# EAGLE board inga_charger_panelized (EAGLE 7.2.0)
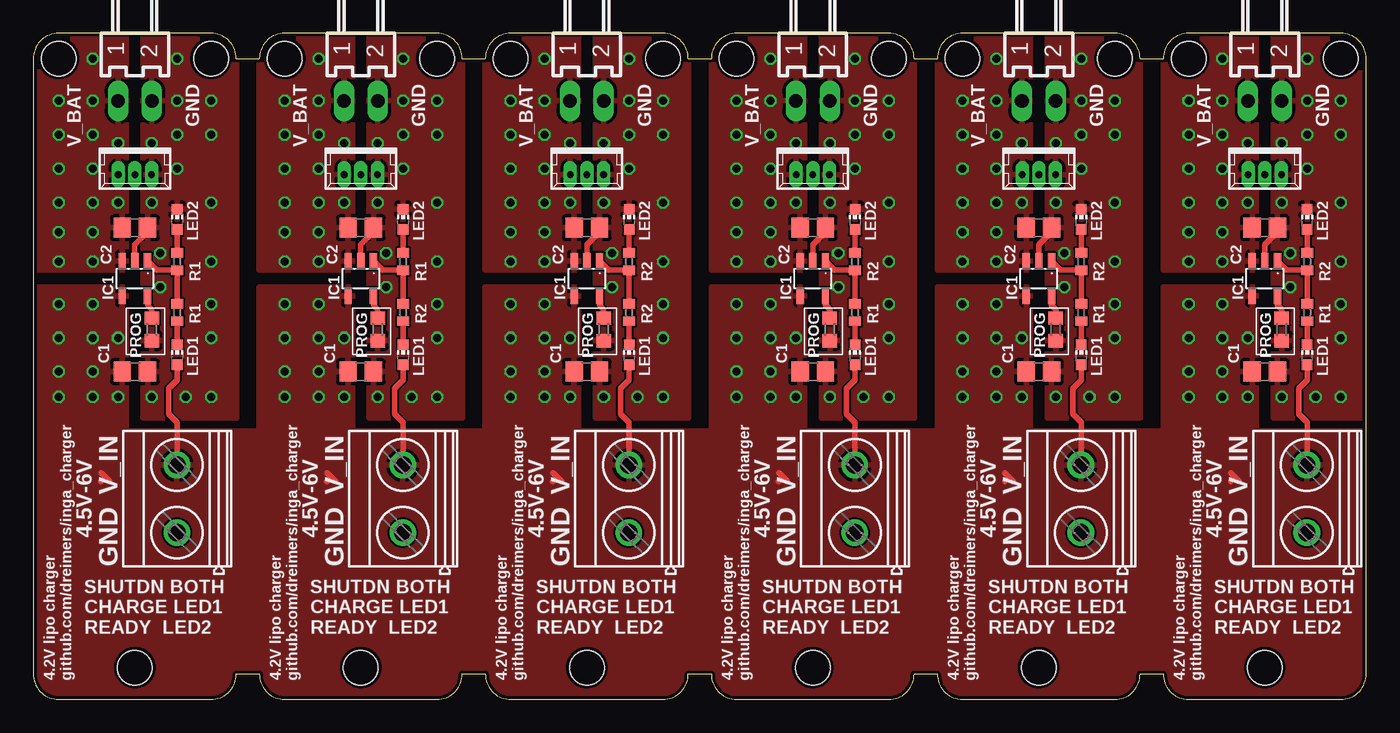
[diagram p0: board, top side]
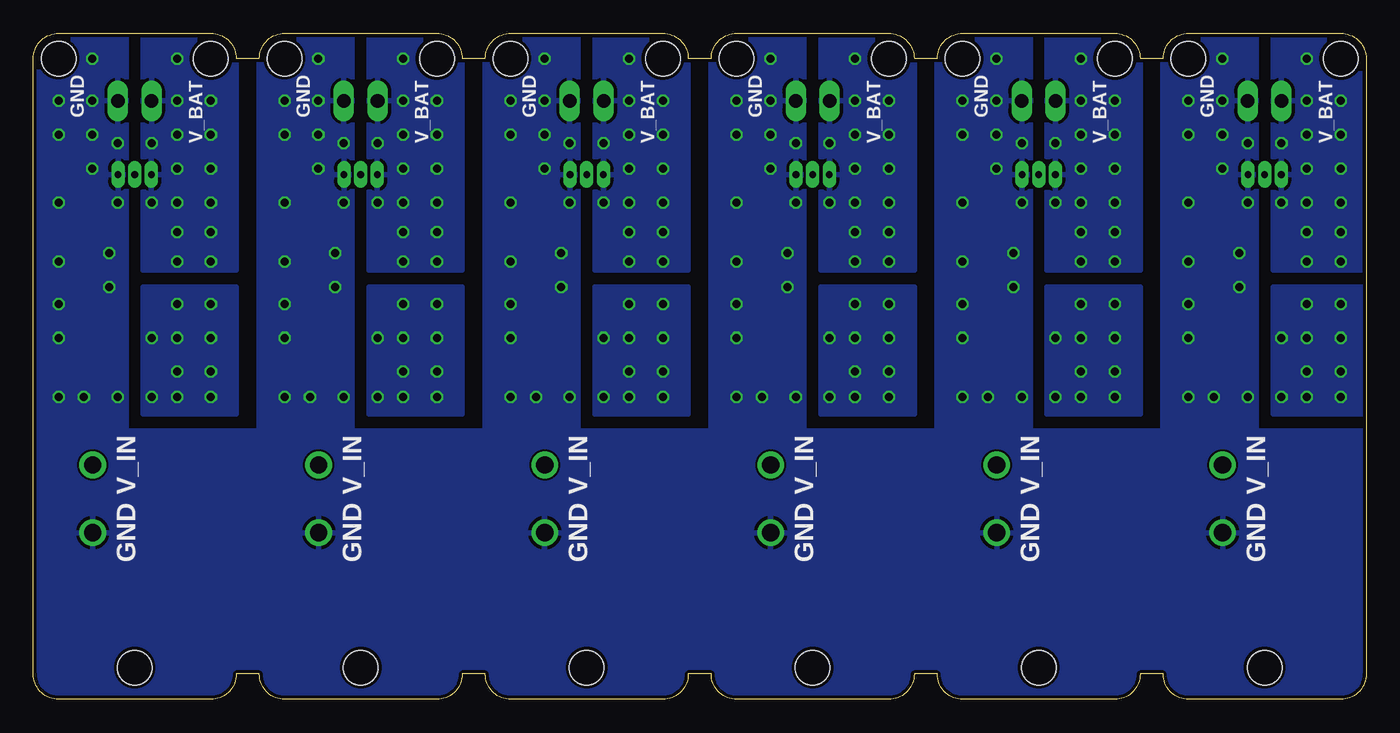
[diagram p1: board, bottom side, seen from below]

Size 100 x 49.99 mm. Coordinates in mm from the lower left corner, seen from the top.
Outline: 0,48.09 0,1.91 arc90 1.91,0 13.32,0 arc90 15.23,1.91 16.95,1.91 arc90 18.86,0 30.28,0 arc90 32.18,1.91 33.91,1.91 arc90 35.81,0 47.23,0 arc90 49.14,1.91 50.86,1.91 arc90 52.77,0 64.18,0 arc90 66.09,1.91 67.82,1.91 arc90 69.72,0 81.14,0 arc90 83.04,1.91 84.77,1.91 arc90 86.67,0 98.09,0 arc90 100,1.91 100,48.09 arc90 98.09,49.99 86.67,49.99 arc90 84.77,48.09 83.04,48.09 arc90 81.14,49.99 69.72,49.99 arc90 67.82,48.09 66.09,48.09 arc90 64.18,49.99 52.77,49.99 arc90 50.86,48.09 49.14,48.09 arc90 47.23,49.99 35.81,49.99 arc90 33.91,48.09 32.18,48.09 arc90 30.28,49.99 18.86,49.99 arc90 16.95,48.09 15.23,48.09 arc90 13.32,49.99 1.91,49.99 arc90 0,48.09
Copper layers (1*16): Top 0.035mm / dielectric 1.5mm / Bottom 0.035mm
Design rules "ITEADstudio_DRC *": minimum track width 6mil, minimum drill 12mil, track to track 6mil, track to pad 6mil, pad to pad 6mil, via to via 6mil, smd to smd 0mil, copper to edge 10mil, drill to drill 10mil, minimum pad ring 10mil, minimum via ring 6mil, stop-mask expansion 2mil, vias tented up to drill 100mil, thermal gap 10mil
Holes 2.6 mm at 7.62,2.38 13.34,48.09 1.91,48.09 24.57,2.38 30.29,48.09 18.86,48.09 41.53,2.38 47.24,48.09 35.81,48.09 58.48,2.38 64.2,48.09 52.77,48.09 75.44,2.38 81.15,48.09 69.72,48.09 92.39,2.38 98.11,48.09 86.67,48.09

## Footprints (pad centres in the part's own frame; a part is rotated, then mirrored left to right if it is on the bottom)
C0805 = smd 1.3 x 1.5: 1 -0.95,0; 2 0.95,0
SOT23-5 = smd 0.55 x 1.2: 1 -0.95,-1.3; 2 0,-1.3; 3 0.95,-1.3; 4 0.95,1.3; 5 -0.95,1.3
7395-02 = drill 1.016 long: 1 1.27,0; 2 -1.27,0
CHIP-LED0603 = smd 0.8 x 0.8: A 0,-0.75; C 0,0.75
53047-03 = drill 0.5 pad 0.698 long: 1 1.25,0.45; 2 0,0.45; 3 -1.25,0.45
R0603 = smd 1 x 1.1: 1 -0.85,0; 2 0.85,0
R0402 = smd 0.7 x 0.9: 1 -0.65,0; 2 0.65,0
MKDSN1,5/2-5,08 = drill 1.3 pad 2: 1 -2.561,0.025; 2 2.519,0.025

## Placement (x,y rotation side)
C1  4u7  [C0805]  7.62,24.6 0 top
C2  4u7  [C0805]  7.62,35.39 0 top
C3  4u7  [C0805]  24.57,24.6 0 top
C4  4u7  [C0805]  24.57,35.39 0 top
C5  4u7  [C0805]  41.53,24.6 0 top
C6  4u7  [C0805]  41.53,35.39 0 top
C7  4u7  [C0805]  58.48,24.6 0 top
C8  4u7  [C0805]  58.48,35.39 0 top
C9  4u7  [C0805]  75.44,24.6 0 top
C10  4u7  [C0805]  75.44,35.39 0 top
C11  4u7  [C0805]  92.39,24.6 0 top
C12  4u7  [C0805]  92.39,35.39 0 top
IC1  [SOT23-5]  7.62,31.59 180 top
IC2  [SOT23-5]  24.57,31.59 180 top
IC3  [SOT23-5]  41.53,31.59 180 top
IC4  [SOT23-5]  58.48,31.59 180 top
IC5  [SOT23-5]  75.44,31.59 180 top
IC6  [SOT23-5]  92.39,31.59 180 top
J1  22-05-7028-02  [7395-02]  7.62,44.92 180 top
J2  22-05-7028-02  [7395-02]  24.57,44.92 180 top
J3  22-05-7028-02  [7395-02]  41.53,44.92 180 top
J4  22-05-7028-02  [7395-02]  58.48,44.92 180 top
J5  22-05-7028-02  [7395-02]  75.44,44.92 180 top
J6  22-05-7028-02  [7395-02]  92.39,44.92 180 top
LED1  [CHIP-LED0603]  10.79,25.87 0 top
LED2  [CHIP-LED0603]  10.79,36.03 0 top
LED3  [CHIP-LED0603]  27.75,25.87 0 top
LED4  [CHIP-LED0603]  27.75,36.03 0 top
LED5  [CHIP-LED0603]  44.7,25.87 0 top
LED6  [CHIP-LED0603]  44.7,36.03 0 top
LED7  [CHIP-LED0603]  61.66,25.87 0 top
LED8  [CHIP-LED0603]  61.66,36.03 0 top
LED9  [CHIP-LED0603]  78.61,25.87 0 top
LED10  [CHIP-LED0603]  78.61,36.03 0 top
LED11  [CHIP-LED0603]  95.56,25.87 0 top
LED12  [CHIP-LED0603]  95.56,36.03 0 top
LIPO  53047-03  [53047-03]  7.62,39.84 180 top
LIPO1  53047-03  [53047-03]  24.57,39.84 180 top
LIPO2  53047-03  [53047-03]  41.53,39.84 180 top
LIPO3  53047-03  [53047-03]  58.48,39.84 180 top
LIPO4  53047-03  [53047-03]  75.44,39.84 180 top
LIPO5  53047-03  [53047-03]  92.39,39.84 180 top
PROG  [R0603]  8.89,27.78 90 top
PROG1  [R0603]  25.84,27.78 90 top
PROG2  [R0603]  42.8,27.78 90 top
PROG3  [R0603]  59.75,27.78 90 top
PROG4  [R0603]  76.71,27.78 90 top
PROG5  [R0603]  93.66,27.78 90 top
R1  470  [R0402]  10.79,29.05 90 top
R2  470  [R0402]  27.75,29.05 90 top
R3  470  [R0402]  27.75,32.85 270 top
R4  470  [R0402]  44.7,29.05 90 top
R5  470  [R0402]  10.79,32.85 270 top
R6  470  [R0402]  44.7,32.85 270 top
R7  470  [R0402]  61.66,29.05 90 top
R8  470  [R0402]  61.66,32.85 270 top
R9  470  [R0402]  78.61,29.05 90 top
R10  470  [R0402]  78.61,32.85 270 top
R11  470  [R0402]  95.56,29.05 90 top
R12  470  [R0402]  95.56,32.85 270 top
VSUPPLY  MKDSN1,5/2-5,08  [MKDSN1,5/2-5,08]  10.79,15.07 90 top
VSUPPLY1  MKDSN1,5/2-5,08  [MKDSN1,5/2-5,08]  27.75,15.07 90 top
VSUPPLY2  MKDSN1,5/2-5,08  [MKDSN1,5/2-5,08]  44.7,15.07 90 top
VSUPPLY3  MKDSN1,5/2-5,08  [MKDSN1,5/2-5,08]  61.66,15.07 90 top
VSUPPLY4  MKDSN1,5/2-5,08  [MKDSN1,5/2-5,08]  78.61,15.07 90 top
VSUPPLY5  MKDSN1,5/2-5,08  [MKDSN1,5/2-5,08]  95.56,15.07 90 top

## Library data of the parts
C1-C12 PROG PROG1-PROG5 R1-R12 = rcl
IC1-IC6 = mcp73831
J1-J6 = con-molex; OC_FARNELL: 9731601; OC_NEWARK: unknown
LED1-LED12 = led
LIPO LIPO1-LIPO5 = con-molex; MPN: 530470310; OC_FARNELL: 9732853; OC_NEWARK: 14R5412
VSUPPLY VSUPPLY1-VSUPPLY5 = con-phoenix-508

## Nets
GND: C1.2 C2.2 C3.2 C4.2 C5.2 C6.2 C7.2 C8.2 C9.2 C10.2 C11.2 C12.2 IC1.2 IC2.2 IC3.2 IC4.2 IC5.2 IC6.2 J1.2 J2.2 J3.2 J4.2 J5.2 J6.2 LED2.C LED4.C LED6.C LED8.C LED10.C LED12.C LIPO1.3 LIPO2.3 LIPO3.3 LIPO4.3 LIPO5.3 LIPO.3 PROG1.1 PROG2.1 PROG3.1 PROG4.1 PROG5.1 PROG.1 VSUPPLY1.1 VSUPPLY2.1 VSUPPLY3.1 VSUPPLY4.1 VSUPPLY5.1 VSUPPLY.1
N$1: LED1.C R1.1
N$2: IC1.1 R1.2 R5.2
N$3: LED3.C R2.1
N$4: IC1.5 PROG.2
N$5: LED2.A R5.1
N$6: IC2.1 R2.2 R3.2
N$7: IC2.5 PROG1.2
N$8: LED4.A R3.1
N$9: LED5.C R4.1
N$10: IC3.1 R4.2 R6.2
N$11: IC3.5 PROG2.2
N$12: LED6.A R6.1
N$13: LED7.C R7.1
N$14: IC4.1 R7.2 R8.2
N$15: IC4.5 PROG3.2
N$16: LED8.A R8.1
N$17: LED9.C R9.1
N$18: IC5.1 R9.2 R10.2
N$19: IC5.5 PROG4.2
N$20: LED10.A R10.1
N$21: LED11.C R11.1
N$22: IC6.1 R11.2 R12.2
N$23: IC6.5 PROG5.2
N$24: LED12.A R12.1
V_BAT: C2.1 IC1.3 J1.1 LIPO.1
V_BAT1: C4.1 IC2.3 J2.1 LIPO1.1
V_BAT2: C6.1 IC3.3 J3.1 LIPO2.1
V_BAT3: C8.1 IC4.3 J4.1 LIPO3.1
V_BAT4: C10.1 IC5.3 J5.1 LIPO4.1
V_BAT5: C12.1 IC6.3 J6.1 LIPO5.1
V_IN: C1.1 C3.1 C5.1 C7.1 C9.1 C11.1 IC1.4 IC2.4 IC3.4 IC4.4 IC5.4 IC6.4 LED1.A LED3.A LED5.A LED7.A LED9.A LED11.A VSUPPLY1.2 VSUPPLY2.2 VSUPPLY3.2 VSUPPLY4.2 VSUPPLY5.2 VSUPPLY.2

## Tracks (layer width: path | path; a pad name or v marks a point on that pad's centre or on a via)
GND  (via drill 0.6)
  Top 0.406: C2.2 8.57,35.07 7.62,34.12 IC1.2 | C6.2 42.48,35.07 41.53,34.12 IC3.2 | C10.2 76.39,35.07 75.44,34.12 IC5.2 | C12.2 93.34,35.07 92.39,34.12 IC6.2 | C4.2 25.52,35.07 24.57,34.12 IC2.2 | C8.2 59.43,35.07 58.48,34.12 IC4.2
  other vias: 11.43,22.7 8.89,37.3 9.53,30.95 8.89,41.74 8.89,22.7 10.79,42.38 10.79,44.92 10.79,48.09 10.79,39.84 13.34,44.92 13.34,42.38 13.34,29.68 13.34,22.7 13.34,32.85 13.34,37.3 13.34,27.14 9.53,33.49 45.34,22.7 42.8,37.3 43.43,30.95 42.8,41.74 42.8,22.7 44.7,42.38 44.7,44.92 44.7,48.09 44.7,39.84 47.24,44.92 47.24,42.38 47.24,29.68 47.24,22.7 47.24,32.85 47.24,37.3 47.24,27.14 43.43,33.49 79.25,22.7 76.71,37.3 77.34,30.95 76.71,41.74 76.71,22.7 78.61,42.38 78.61,44.92 78.61,48.09 78.61,39.84 81.15,44.92 81.15,42.38 81.15,29.68 81.15,22.7 81.15,32.85 81.15,37.3 81.15,27.14 77.34,33.49 96.2,22.7 93.66,37.3 94.3,30.95 93.66,41.74 93.66,22.7 95.56,42.38 95.56,44.92 95.56,48.09 95.56,39.84 98.11,44.92 98.11,42.38 98.11,29.68 98.11,22.7 98.11,32.85 98.11,37.3 98.11,27.14 94.3,33.49 28.38,22.7 25.84,37.3 26.48,30.95 25.84,41.74 25.84,22.7 27.75,42.38 27.75,44.92 27.75,48.09 27.75,39.84 30.29,44.92 30.29,42.38 30.29,29.68 30.29,22.7 30.29,32.85 30.29,37.3 30.29,27.14 26.48,33.49 62.29,22.7 59.75,37.3 60.39,30.95 59.75,41.74 59.75,22.7 61.66,42.38 61.66,44.92 61.66,48.09 61.66,39.84 64.2,44.92 64.2,42.38 64.2,29.68 64.2,22.7 64.2,32.85 64.2,37.3 64.2,27.14 60.39,33.49
  pour Bottom: 15.24,50 15.24,20.16 8.26,20.16 8.26,50
  pour Top: 15.24,50 15.24,21.11 8.26,21.11 8.26,50
  pour Bottom: 17.78,-0.17 17.78,20.16 0,20.16 0,-0.17
  pour Bottom: 49.15,50 49.15,20.16 42.16,20.16 42.16,50
  pour Top: 49.15,50 49.15,21.11 42.16,21.11 42.16,50
  pour Bottom: 51.69,-0.17 51.69,20.16 33.91,20.16 33.91,-0.17
  pour Bottom: 83.06,50 83.06,20.16 76.07,20.16 76.07,50
  pour Top: 83.06,50 83.06,21.11 76.07,21.11 76.07,50
  pour Bottom: 85.6,-0.17 85.6,20.16 67.82,20.16 67.82,-0.17
  pour Bottom: 100.01,50 100.01,20.16 93.03,20.16 93.03,50
  pour Top: 100.01,50 100.01,21.11 93.03,21.11 93.03,50
  pour Bottom: 100.01,-0.17 100.01,20.16 84.77,20.16 84.77,-0.17
  pour Bottom: 32.19,50 32.19,20.16 25.21,20.16 25.21,50
  pour Top: 32.19,50 32.19,21.11 25.21,21.11 25.21,50
  pour Bottom: 34.73,-0.17 34.73,20.16 16.95,20.16 16.95,-0.17
  pour Bottom: 66.1,50 66.1,20.16 59.12,20.16 59.12,50
  pour Top: 66.1,50 66.1,21.11 59.12,21.11 59.12,50
  pour Bottom: 68.64,-0.17 68.64,20.16 50.86,20.16 50.86,-0.17
N$1
  Top 0.406: R1.1 LED1.C
N$2
  Top 0.406: IC1.1 9.25,32.2 R5.2 R1.2
N$3
  Top 0.406: R2.1 LED3.C
N$4
  Top 0.406: IC1.5 8.57,29.58 8.89,29.26 PROG.2
N$5
  Top 0.406: LED2.A R5.1
N$6
  Top 0.406: IC2.1 26.2,32.2 R3.2 R2.2
N$7
  Top 0.406: IC2.5 25.52,29.58 25.84,29.26 PROG1.2
N$8
  Top 0.406: LED4.A R3.1
N$9
  Top 0.406: R4.1 LED5.C
N$10
  Top 0.406: IC3.1 43.16,32.2 R6.2 R4.2
N$11
  Top 0.406: IC3.5 42.48,29.58 42.8,29.26 PROG2.2
N$12
  Top 0.406: LED6.A R6.1
N$13
  Top 0.406: R7.1 LED7.C
N$14
  Top 0.406: IC4.1 60.11,32.2 R8.2 R7.2
N$15
  Top 0.406: IC4.5 59.43,29.58 59.75,29.26 PROG3.2
N$16
  Top 0.406: LED8.A R8.1
N$17
  Top 0.406: R9.1 LED9.C
N$18
  Top 0.406: IC5.1 77.07,32.2 R10.2 R9.2
N$19
  Top 0.406: IC5.5 76.39,29.58 76.71,29.26 PROG4.2
N$20
  Top 0.406: LED10.A R10.1
N$21
  Top 0.406: R11.1 LED11.C
N$22
  Top 0.406: IC6.1 94.02,32.2 R12.2 R11.2
N$23
  Top 0.406: IC6.5 93.34,29.58 93.66,29.26 PROG5.2
N$24
  Top 0.406: LED12.A R12.1
V_BAT  (via drill 0.6)
  other vias: 6.35,37.3 6.35,41.74 4.45,37.3 4.45,39.84 4.45,42.38 4.45,44.92 4.45,48.09 4.45,32.85 1.91,44.92 1.91,42.38 1.91,39.84 1.91,37.3 1.91,32.85 4.45,35.08 1.91,35.08
  pour Bottom (isolate 0.305): 0,32.22 6.99,32.22 6.99,50 0,50
  pour Top: 6.99,50 6.99,32.22 0,32.22 0,50
V_BAT1  (via drill 0.6)
  other vias: 23.3,37.3 23.3,41.74 21.4,37.3 21.4,39.84 21.4,42.38 21.4,44.92 21.4,48.09 21.4,32.85 18.86,44.92 18.86,42.38 18.86,39.84 18.86,37.3 18.86,32.85 21.4,35.08 18.86,35.08
  pour Bottom (isolate 0.305): 16.95,32.22 23.94,32.22 23.94,50 16.95,50
  pour Top: 23.94,50 23.94,32.22 16.95,32.22 16.95,50
V_BAT2  (via drill 0.6)
  other vias: 40.26,37.3 40.26,41.74 38.35,37.3 38.35,39.84 38.35,42.38 38.35,44.92 38.35,48.09 38.35,32.85 35.81,44.92 35.81,42.38 35.81,39.84 35.81,37.3 35.81,32.85 38.35,35.08 35.81,35.08
  pour Bottom (isolate 0.305): 33.91,32.22 40.89,32.22 40.89,50 33.91,50
  pour Top: 40.89,50 40.89,32.22 33.91,32.22 33.91,50
V_BAT3  (via drill 0.6)
  other vias: 57.21,37.3 57.21,41.74 55.31,37.3 55.31,39.84 55.31,42.38 55.31,44.92 55.31,48.09 55.31,32.85 52.77,44.92 52.77,42.38 52.77,39.84 52.77,37.3 52.77,32.85 55.31,35.08 52.77,35.08
  pour Bottom (isolate 0.305): 50.86,32.22 57.85,32.22 57.85,50 50.86,50
  pour Top: 57.85,50 57.85,32.22 50.86,32.22 50.86,50
V_BAT4  (via drill 0.6)
  other vias: 74.17,37.3 74.17,41.74 72.26,37.3 72.26,39.84 72.26,42.38 72.26,44.92 72.26,48.09 72.26,32.85 69.72,44.92 69.72,42.38 69.72,39.84 69.72,37.3 69.72,32.85 72.26,35.08 69.72,35.08
  pour Bottom (isolate 0.305): 67.82,32.22 74.8,32.22 74.8,50 67.82,50
  pour Top: 74.8,50 74.8,32.22 67.82,32.22 67.82,50
V_BAT5  (via drill 0.6)
  other vias: 91.12,37.3 91.12,41.74 89.22,37.3 89.22,39.84 89.22,42.38 89.22,44.92 89.22,48.09 89.22,32.85 86.67,44.92 86.67,42.38 86.67,39.84 86.67,37.3 86.67,32.85 89.22,35.08 86.67,35.08
  pour Bottom (isolate 0.305): 84.77,32.22 91.75,32.22 91.75,50 84.77,50
  pour Top: 91.75,50 91.75,32.22 84.77,32.22 84.77,50
V_IN  (via drill 0.6)
  Top 0.406: 5.71,16.35 5.08,16.98 | 5.08,16.35 5.06,16.37 | LED1.A 10.79,23.96 10.16,23.33 10.16,21.43 10.79,20.79 10.79,17.62 VSUPPLY.2 | 39.62,16.35 38.99,16.98 | 38.99,16.35 38.97,16.37 | LED5.A 44.7,23.96 44.07,23.33 44.07,21.43 44.7,20.79 44.7,17.62 VSUPPLY2.2 | 22.67,16.35 22.03,16.98 | 22.03,16.35 22.01,16.37 | LED3.A 27.75,23.96 27.11,23.33 27.11,21.43 27.75,20.79 27.75,17.62 VSUPPLY1.2 | 56.58,16.35 55.94,16.98 | 55.94,16.35 55.92,16.37 | LED7.A 61.66,23.96 61.02,23.33 61.02,21.43 61.66,20.79 61.66,17.62 VSUPPLY3.2 | 73.53,16.35 72.9,16.98 | 72.9,16.35 72.88,16.37 | LED9.A 78.61,23.96 77.98,23.33 77.98,21.43 78.61,20.79 78.61,17.62 VSUPPLY4.2 | 90.48,16.35 89.85,16.98 | 89.85,16.35 89.83,16.37 | LED11.A 95.56,23.96 94.93,23.33 94.93,21.43 95.56,20.79 95.56,17.62 VSUPPLY5.2
  other vias: 4.45,29.68 4.45,27.14 4.45,24.6 6.35,27.14 4.45,22.7 6.35,22.7 1.91,29.68 1.91,27.14 1.91,24.6 1.91,22.7 38.35,29.68 38.35,27.14 38.35,24.6 40.26,27.14 38.35,22.7 40.26,22.7 35.81,29.68 35.81,27.14 35.81,24.6 35.81,22.7 21.4,29.68 21.4,27.14 21.4,24.6 23.3,27.14 21.4,22.7 23.3,22.7 18.86,29.68 18.86,27.14 18.86,24.6 18.86,22.7 55.31,29.68 55.31,27.14 55.31,24.6 57.21,27.14 55.31,22.7 57.21,22.7 52.77,29.68 52.77,27.14 52.77,24.6 52.77,22.7 72.26,29.68 72.26,27.14 72.26,24.6 74.17,27.14 72.26,22.7 74.17,22.7 69.72,29.68 69.72,27.14 69.72,24.6 69.72,22.7 89.22,29.68 89.22,27.14 89.22,24.6 91.12,27.14 89.22,22.7 91.12,22.7 86.67,29.68 86.67,27.14 86.67,24.6 86.67,22.7
  pour Bottom (isolate 0.254): 6.99,21.43 0,21.43 0,30.95 6.99,30.95
  pour Top: 6.99,30.95 0,30.95 0,11.9 6.99,11.9
  pour Top: 0,20.16 0,-0.17 17.78,-0.17 17.78,20.16
  pour Bottom (isolate 0.254): 40.89,21.43 33.91,21.43 33.91,30.95 40.89,30.95
  pour Top: 40.89,30.95 33.91,30.95 33.91,11.9 40.89,11.9
  pour Top: 33.91,20.16 33.91,-0.17 51.69,-0.17 51.69,20.16
  pour Bottom (isolate 0.254): 23.94,21.43 16.95,21.43 16.95,30.95 23.94,30.95
  pour Top: 23.94,30.95 16.95,30.95 16.95,11.9 23.94,11.9
  pour Top: 16.95,20.16 16.95,-0.17 34.73,-0.17 34.73,20.16
  pour Bottom (isolate 0.254): 57.85,21.43 50.86,21.43 50.86,30.95 57.85,30.95
  pour Top: 57.85,30.95 50.86,30.95 50.86,11.9 57.85,11.9
  pour Top: 50.86,20.16 50.86,-0.17 68.64,-0.17 68.64,20.16
  pour Bottom (isolate 0.254): 74.8,21.43 67.82,21.43 67.82,30.95 74.8,30.95
  pour Top: 74.8,30.95 67.82,30.95 67.82,11.9 74.8,11.9
  pour Top: 67.82,20.16 67.82,-0.17 85.6,-0.17 85.6,20.16
  pour Bottom (isolate 0.254): 91.75,21.43 84.77,21.43 84.77,30.95 91.75,30.95
  pour Top: 91.75,30.95 84.77,30.95 84.77,11.9 91.75,11.9
  pour Top: 84.77,20.16 84.77,-0.17 100.01,-0.17 100.01,20.16

## Text on the board
tNames: V_BAT | GND | V_BAT | GND | V_BAT | GND | V_BAT | GND | V_BAT | GND | V_BAT | GND | V_IN | V_IN | V_IN | V_IN | V_IN | V_IN | 4.5V-6V | 4.5V-6V | 4.5V-6V | 4.5V-6V | 4.5V-6V | 4.5V-6V | GND | GND | GND | GND | GND | GND | SHUTDN BOTH / CHARGE LED1 / READY LED2 | SHUTDN BOTH / CHARGE LED1 / READY LED2 | SHUTDN BOTH / CHARGE LED1 / READY LED2 | SHUTDN BOTH / CHARGE LED1 / READY LED2 | SHUTDN BOTH / CHARGE LED1 / READY LED2 | SHUTDN BOTH / CHARGE LED1 / READY LED2 | 4.2V lipo charger / github.com/dreimers/inga_charger | 4.2V lipo charger / github.com/dreimers/inga_charger | 4.2V lipo charger / github.com/dreimers/inga_charger | 4.2V lipo charger / github.com/dreimers/inga_charger | 4.2V lipo charger / github.com/dreimers/inga_charger | 4.2V lipo charger / github.com/dreimers/inga_charger
bNames: GND | GND | GND | GND | GND | GND | V_BAT | V_BAT | V_BAT | V_BAT | V_BAT | V_BAT | V_IN | V_IN | V_IN | V_IN | V_IN | V_IN | GND | GND | GND | GND | GND | GND
_tNames: C2 | LED2 | C2 | LED2 | C2 | LED2 | C2 | LED2 | C2 | LED2 | C2 | LED2 | R1 | R1 | R2 | R2 | R2 | R2 | IC1 | R1 | IC1 | R2 | IC1 | R2 | IC1 | R1 | IC1 | R1 | IC1 | R1 | PROG | PROG | PROG | PROG | PROG | PROG | C1 | C1 | C1 | C1 | C1 | C1 | LED1 | LED1 | LED1 | LED1 | LED1 | LED1